# Altium PCB mp9943_evb.PcbDoc
Units mil, origin at the board's own origin, x right, y up, seen from the top; angles counter-clockwise.
Board outline 1968.5 x 1968.5 mil, 2 copper layers (Top Layer, Bottom Layer); 96 components, 36 nets, 227 pads, 338 vias.
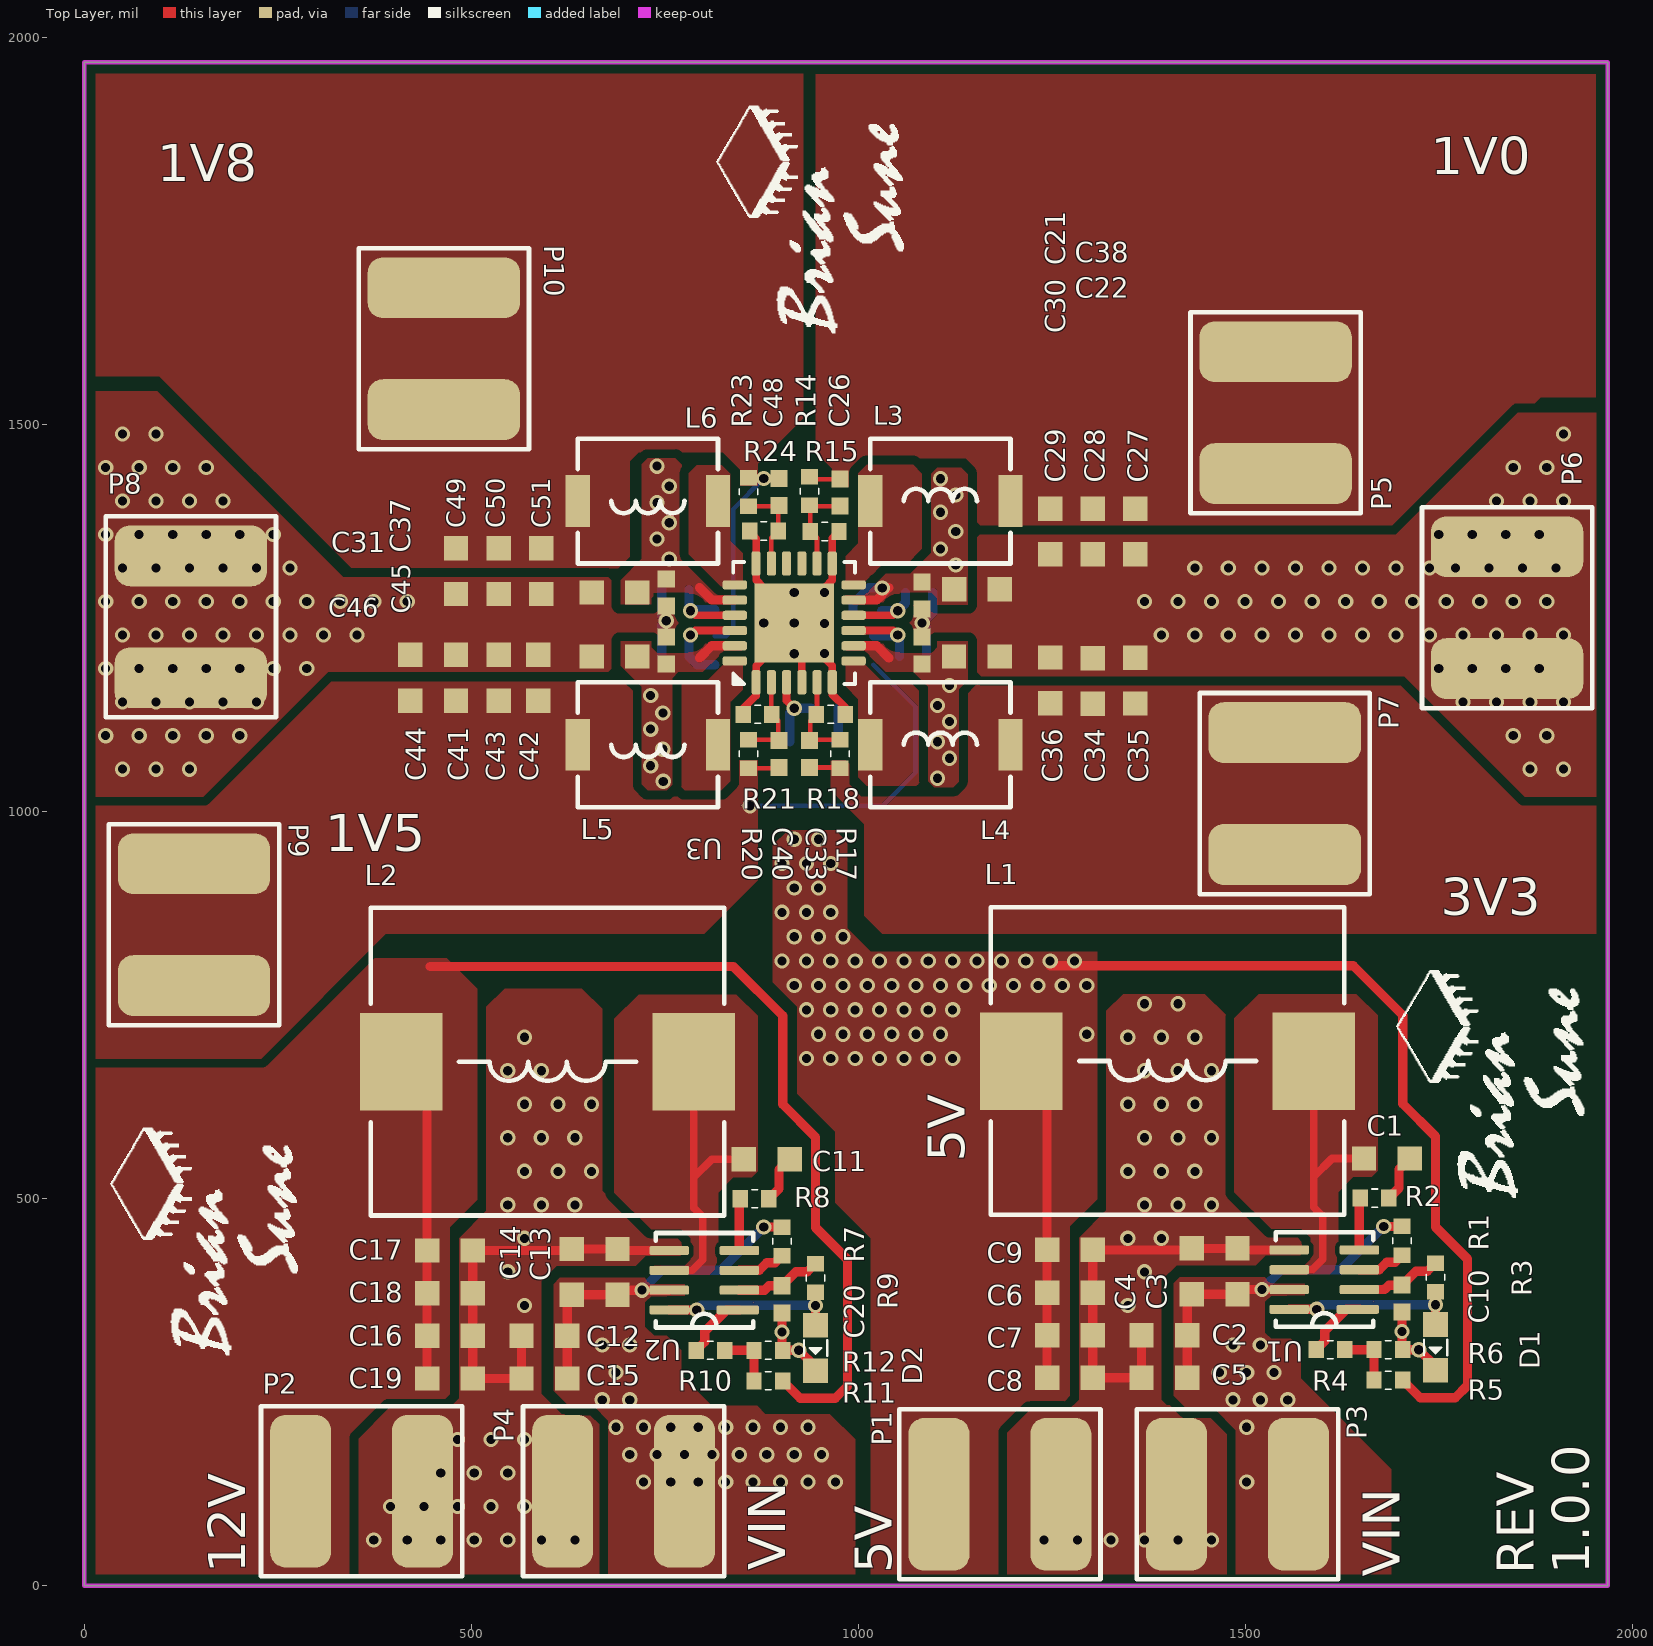
[diagram p0: Top Layer view]
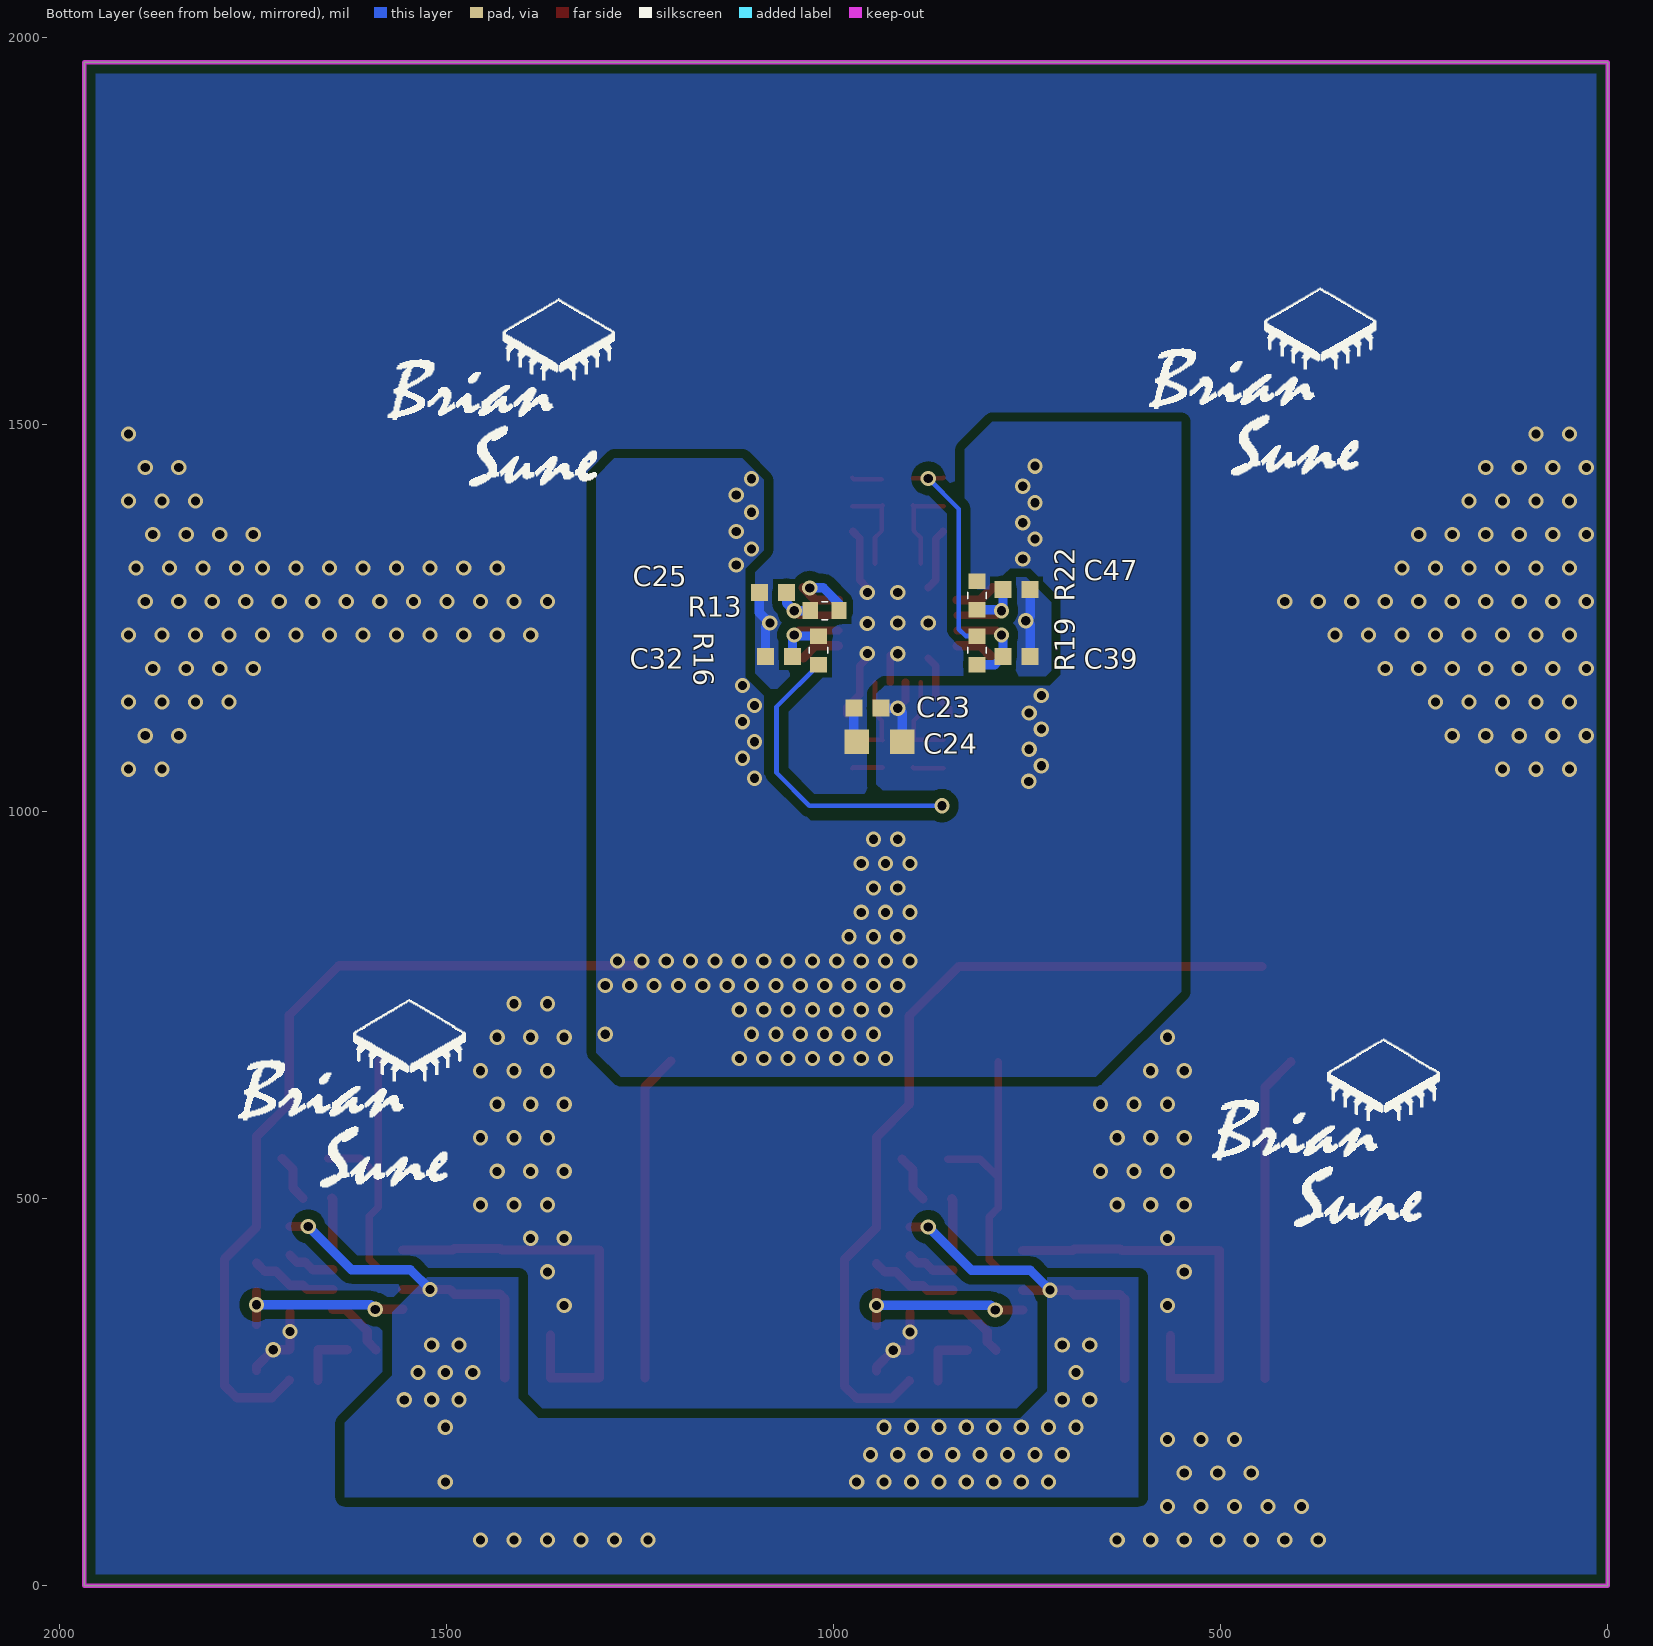
[diagram p1: Bottom Layer view, seen from below]
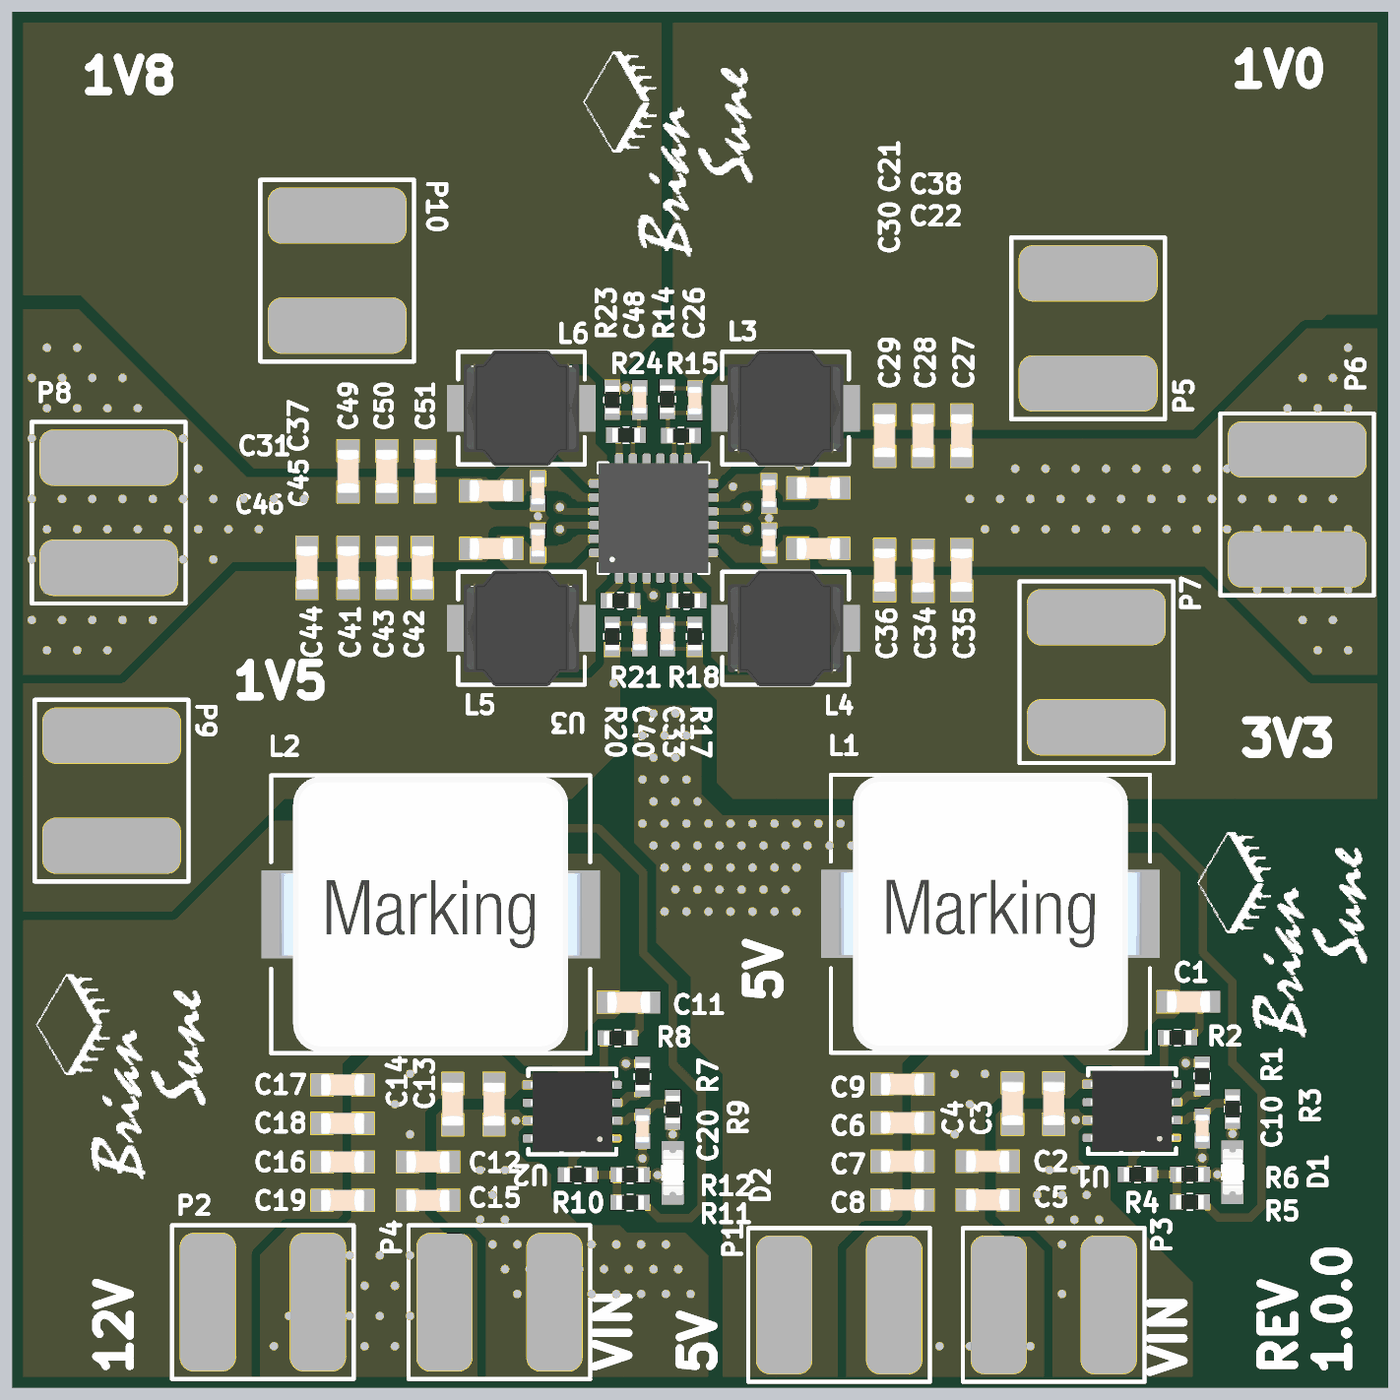
[diagram p2: 3D render of the assembled board from above, using the file's embedded part models]
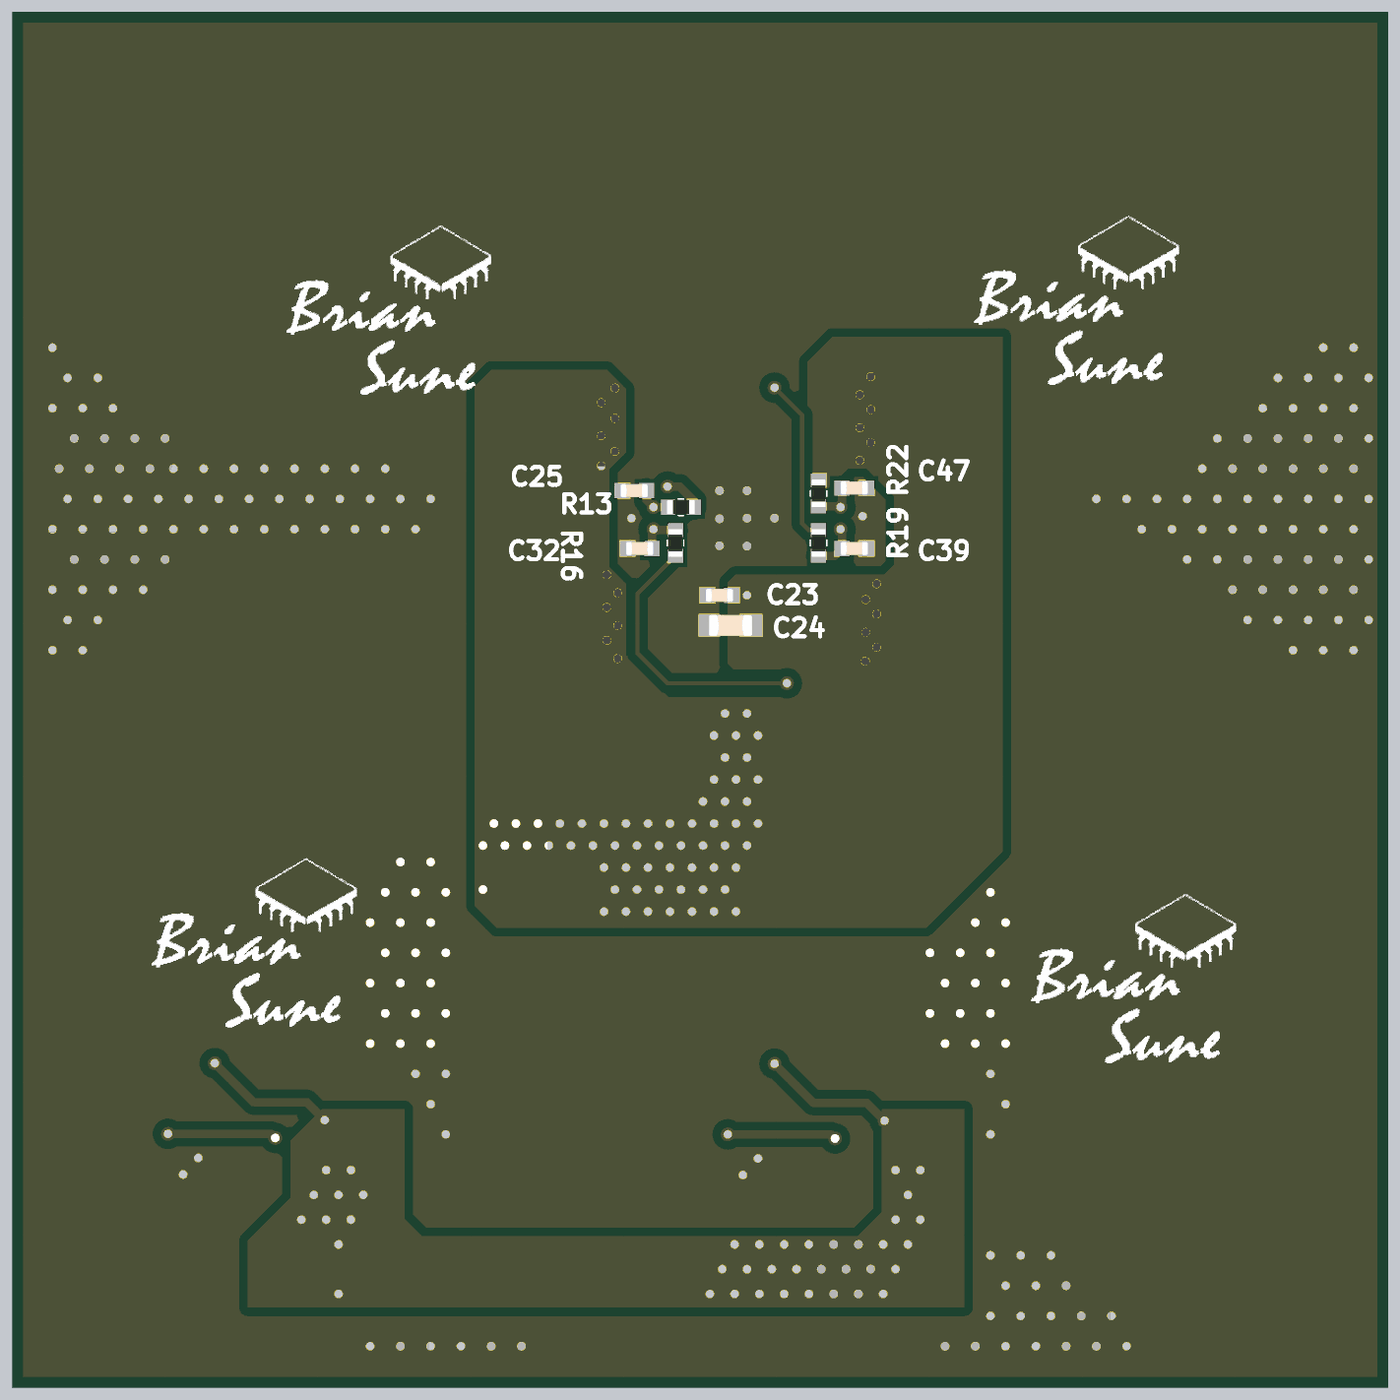
[diagram p3: 3D render of the assembled board from below, using the file's embedded part models]

## Layer stack, top to bottom
Top Solder: solder mask 0.4, Solder Resist, Dk 3.5
Top Layer: signal copper 1.4
Dielectric 1: dielectric 12.6, FR-4, Dk 4.8
Bottom Layer: signal copper 1.4
Bottom Solder: solder mask 0.4, Solder Resist, Dk 3.5

## Board outline
0,0 0,1968.5 1968.5,1968.5 1968.5,0

## Design rules (kind name [scope] priority, off if disabled: settings)
Clearance [All] p1: gap=6 ignorepadtopadclearanceinfootprint=FALSE except(0: Arc-Hole Track-Hole SMDPad-Hole THPad-Hole Via-Hole Fill-Hole Poly-Hole Region-Hole Text-Hole; 8: SMDPad-Region THPad-Region Poly-Region; 12: Arc-Poly Track-Poly THPad-Poly Via-Poly Fill-Poly Poly-Poly)
ComponentClearance [All] p1: gap=11.81 collisioncheckmode=3 verticalgap=11.81 showdistances=FALSE
DiffPairsRouting [All] p1: maxlimit=10 minlimit=6 mostfreqgap=8 toplayer_minwidth=6 toplayer_maxwidth=15 toplayer_prefwidth=8 bottomlayer_minwidth=6 bottomlayer_maxwidth=15 bottomlayer_prefwidth=8 maxuncoupledlength=500
Height [All] p1: minheight=0 maxheight=1574.8 prefheight=500
HoleSize [All] p1: absolutevalues=TRUE maxlimit=236.22 minlimit=1 maxpercent=80.000 minpercent=20.000
HoleToHoleClearance [All] p1: gap=3 allowstackedmicrovias=TRUE
MinimumSolderMaskSliver [All] p1: minsoldermaskwidth=1
PolygonConnect [All] p1: connectstyle=Direct reliefconductorwidth=12 reliefentries=4 polygonreliefangle="90 Angle" airgapwidth=12
RoutingVias [All] p1: holewidth=15.75 width=23.62 viastyle="Through Hole" minholewidth=11.81 minwidth=19.68 maxholewidth=110.24 maxwidth=118.11
SilkToSilkClearance [All] p1: silktosilkclearance=3
SilkToSolderMaskClearance [IsPad] p1: minsilkscreentomaskgap=1 clearancetoexposedcopper=TRUE
SolderMaskExpansion [All] p1: expansion=1
Width [All] p1: maxlimit=40 minlimit=6 preferedwidth=10
22 further rules are at their usual default settings.

## Classes and differential pairs
component class ZYNQ_PWR: C21 C22 C23 C24 C25 C26 C27 C28 C29 C30 C31 C32 C33 C34 C35 C36 C37 C38 C39 C40 C41 C42 C43 C44 C45 C46 C47 C48 C49 C50 C51 L3 L4 L5 L6 P5 P6 P7 P8 P9 P10 R13 R14 R15 R16 R17 R18 R19 R20 R21 R22 R23 R24 U3
component class mp9943_evb: C1 C2 C3 C4 C5 C6 C7 C8 C9 C10 C11 C12 C13 C14 C15 C16 C17 C18 C19 C20 D1 D2 L1 L2 P1 P2 P3 P4 R1 R2 R3 R4 R5 R6 R7 R8 R9 R10 R11 R12 U1 U2

## Components (designator, comment, footprint, x,y, rotation, side; value= is the part's Value field where it differs from the comment)
C1 "100nF" C0603 1683.07,551.96 r0 top
C2 "100nF" C0603 1395.67,323.62 r0 top
C3 "10uF" C0603 1490.16,406.3 r270 top
C4 "10uF" C0603 1431.1,406.3 r270 top
C5 "10uF" C0603 1395.67,268.5 r0 top
C6 "22uF" C0603 1273.62,378.74 r180 top
C7 "22uF" C0603 1273.62,323.62 r180 top
C8 "22uF" C0603 1273.62,268.5 r180 top
C9 "100nF" C0603 1273.62,433.85 r180 top
C10 "100nF" 0402#1 1702.76,370.86 r90 top
C11 "100nF" C0603 881.89,551.18 r0 top
C12 "100nF" C0603 594.49,322.83 r0 top
C13 "10uF" C0603 688.98,405.51 r270 top
C14 "10uF" C0603 629.92,405.51 r270 top
C15 "10uF" C0603 594.49,267.72 r0 top
C16 "22uF" C0603 472.44,322.83 r180 top
C17 "22uF" C0603 472.44,433.07 r180 top
C18 "22uF" C0603 472.44,377.95 r180 top
C19 "100nF" C0603 472.44,267.72 r180 top
C20 "100nF" 0402#1 901.57,370.08 r90 top
C21 "100nF" 0402#1 1082.68,1279.53 r270 top
C22 "10uF" C0603 1153.32,1200.72 r180 top
C23 "100nF" 0402#1 956.69,1133.86 r0 bottom
C24 "10uF" C0603 940.94,1090.55 r180 bottom
C25 "100nF" 0402#1 1078.74,1283.46 r0 bottom
C26 "180pF" 0402#1 976.38,1412.39 r270 top
C27 "22uF" C0603 1358.27,1362.2 r90 top
C28 "10uF" C0603 1303.15,1362.2 r90 top
C29 "10uF" C0603 1248.03,1362.2 r90 top
C30 "100nF" 0402#1 1082.68,1208.58 r90 top
C31 "10uF" C0603 685.04,1283.46 r0 top
C32 "100nF" 0402#1 1070.87,1200.79 r0 bottom
C33 "180pF" 0402#1 937.01,1074.8 r90 top
C34 "22uF" C0603 1303.15,1168.96 r270 top
C35 "10uF" C0603 1358.27,1169.55 r270 top
C36 "10uF" C0603 1248.03,1169.93 r270 top
C37 "100nF" 0402#1 751.97,1283.46 r270 top
C38 "10uF" C0603 1153.54,1287.4 r180 top
C39 "100nF" 0402#1 763.78,1200.79 r180 bottom
C40 "180pF" 0402#1 897.64,1074.8 r90 top
C41 "22uF" C0603 480.31,1173.23 r270 top
C42 "10uF" C0603 586.61,1173.23 r270 top
C43 "10uF" C0603 535.43,1173.23 r270 top
C44 "10uF" C0603 421.26,1173.23 r270 top
C45 "100nF" 0402#1 751.97,1208.66 r90 top
C46 "10uF" C0603 685.1,1200.72 r0 top
C47 "100nF" 0402#1 763.78,1287.4 r180 bottom
C48 "180pF" 0402#1 897.64,1413.39 r270 top
C49 "22uF" C0603 480.32,1311.02 r90 top
C50 "10uF" C0603 535.43,1311.02 r90 top
C51 "10uF" C0603 590.55,1311.02 r90 top
D1 "Green" LED_SML-LX0603GW-TR_LUM 1746.06,307.87 r90 top
D2 "Green" LED_SML-LX0603GW-TR_LUM 944.88,307.09 r90 top
L1 "2.2uH" IND_1040-WE-LHMI_WRE 1399.61,677.95 r0 top
L2 "2.2uH" IND_1040-WE-LHMI_WRE 598.43,677.17 r0 top
L3 "2.2uH" 04x0SMD 1106.3,1401.57 r180 top
L4 "2.2uH" 04x0SMD 1106.29,1086.61 r180 top
L5 "2.2uH" 04x0SMD 728.34,1086.61 r0 top
L6 "2.2uH" 04x0SMD 728.34,1401.57 r0 top
P1 "A11/6.3uH" 2x3mmPad 1183.07,118.11 r0 top
P2 "A11/6.3uH" 2x3mmPad 358.27,122.05 r0 top
P3 "A11/6.3uH" 2x3mmPad 1490.16,118.11 r180 top
P4 "A11/6.3uH" 2x3mmPad 696.85,122.05 r180 top
P5 "A11/6.3uH" 2x3mmPad 1539.37,1515.75 r90 top
P6 "A11/6.3uH" 2x3mmPad 1838.58,1263.78 r90 top
P7 "A11/6.3uH" 2x3mmPad 1551.18,1023.62 r90 top
P8 "A11/6.3uH" 2x3mmPad 137.66,1251.97 r90 top
P9 "A11/6.3uH" 2x3mmPad 141.73,854.11 r90 top
P10 "A11/6.3uH" 2x3mmPad 464.57,1598.43 r270 top
R1 "1M" 0402#2 1702.76,445.67 r90 top
R2 "22R" 0402#2 1667.32,500.78 r0 top
R3 "1M" 0402#2 1746.06,398.42 r270 top
R4 "51k" 0402#2 1610.24,304.92 r0 top
R5 "51k" 0402#2 1685.04,265.55 r0 top
R6 "51k" 0402#2 1685.04,304.92 r180 top
R7 "1M" 0402#2 901.57,444.88 r90 top
R8 "22R" 0402#2 866.14,500 r0 top
R9 "1M" 0402#2 944.88,397.64 r270 top
R10 "51k" 0402#2 809.06,304.13 r0 top
R11 "51k" 0402#2 883.86,264.76 r0 top
R12 "51k" 0402#2 883.86,304.13 r180 top
R13 "100k" 0402#2 1011.81,1259.84 r0 bottom
R14 "100k" 0402#2 937.01,1414.39 r90 top
R15 "150k" 0402#2 956.69,1362.2 r0 top
R16 "100k" 0402#2 1019.69,1208.66 r90 bottom
R17 "200k" 0402#2 976.38,1074.8 r270 top
R18 "44k2" 0402#2 964.57,1125.98 r180 top
R19 "100k" 0402#2 814.96,1208.66 r270 bottom
R20 "150k" 0402#2 858.27,1074.8 r270 top
R21 "100k" 0402#2 870.08,1125.98 r0 top
R22 "100k" 0402#2 814.96,1279.53 r270 bottom
R23 "200k" 0402#2 858.27,1413.39 r90 top
R24 "100k" 0402#2 878.14,1363.02 r180 top
U1 "MP9943GQ-Z" QFN8_3x3_NEP 1602.36,395.47 r180 top
U2 "MP9943GQ-Z" QFN8_3x3_NEP 801.18,394.69 r180 top
U3 "EA3059" QFN-24 917.32,1244.09 r90 top

## Footprints (in the part's own frame and the unit in brackets; to place one, negate y for a bottom-side part, rotate by r counter-clockwise, add the part's x,y. Pads: shape width x height; smd on the part's side, far side on the other; paste and mask are expansions set on the pad)
2x3mmPad [mm]
  rrect50% 2x5 smd: 1(-2,0) 2(2,0)
  silkscreen extent -3.3,-2.79 3.3,2.79
04x0SMD [mm]
  rect 0.8x1.7 smd paste+0 mask+0: 1(-2.3,0) 2(2.3,0)
  silkscreen extent -2.3,-2.05 2.3,2.05, body extent -2.1,-2.1 2.1,2.1, height 1.8
0402#1 [mil]
  rect 22x22 smd: 1(-17.5,0) 2(17.5,0)
  body extent -20,-10 20,10, height 20
0402#2 [mil]
  rect 20x22 smd: 1(-18.5,0) 2(18.5,0)
  silkscreen extent -4,-12 4,12, body extent -20,-10 20,10, height 14
C0603 [mm]
  rect 0.8x0.8 smd: 1(-0.75,0) 2(0.75,0)
  body extent -0.8,-0.4 0.8,0.4, height 0.81
IND_1040-WE-LHMI_WRE [mm]
  rect 2.7x3.2 smd paste+0 mask+0: 1(-4.8,0) 2(4.8,0)
  silkscreen extent -5.8,-5.05 5.8,5.05, body extent -5.5,-5 5.5,5, height 3.8
LED_SML-LX0603GW-TR_LUM [mil]
  rect 32x32 smd paste+0 mask+0: 1(-29.5,0) 2(29.5,0)
  silkscreen extent -10,-15 10,15, body extent -32,-14 33,14, height 27
QFN8_3x3_NEP [mm]
  rrect50% 1.4x0.3 smd paste-0.064: 1(-1.1,0.975)
  rrect40% 1.3x0.3 smd: 2(-1.15,0.325) 3(-1.15,-0.325) 4(-1.15,-0.975) 5(1.15,-0.975) 6(1.15,-0.325) 7(1.15,0.325) 8(1.15,0.975)
  silkscreen extent -1.6,-1.55 1.6,1.55, body extent -1.5,-1.45 1.5,1.45, height 0.6
QFN-24 [mm]
  rrect50% 0.8x0.3 smd: 1(-1.95,1.25) 2(-1.95,0.75) 3(-1.95,0.25) 4(-1.95,-0.25) 5(-1.95,-0.75) 6(-1.95,-1.25) 13(1.95,-1.25) 14(1.95,-0.75) 15(1.95,-0.25) 16(1.95,0.25) 17(1.95,0.75) 18(1.95,1.25)
  rrect50% 0.3x0.8 smd: 7(-1.25,-1.95) 8(-0.75,-1.95) 9(-0.25,-1.95) 10(0.25,-1.95) 11(0.75,-1.95) 12(1.25,-1.95) 19(1.25,1.95) 20(0.75,1.95) 21(0.25,1.95) 22(-0.25,1.95) 23(-0.75,1.95) 24(-1.25,1.95)
  rect 2.6x2.6 smd: 25(0,0)
  silkscreen extent -2,-2 2,2, body extent -2,-2 2,2, height 0.9

## Part data
C1 C2 C9 C11 C12 C19: library part taobao_100nF, "104P 50V 0.1UF 100NF", Mfr.="Your Cee", Mfr. No=104P, ComponentLink1Description=taobao, ComponentLink1URL=https://item.taobao.com/item.htm?spm=a1z09.2.0.0.37a92e8dhQcjld&id=522573286298&_u=k10quk0k8828, Price=0.01
C3 C4 C5 C13 C14 C15 C22 C24 C28 C29 C31 C35 C36 C38 C42 C43 C44 C46 C50 C51: library part taobao_10uF, "OUDEIBUN / 50V 10% 106K X5R", Mfr.=OUDEIBUN, Mfr. No=106, ComponentLink1Description=taobao, ComponentLink1URL=https://detail.tmall.com/item.htm?abbucket=11&id=610884231672&rn=bfecce7903ee26d41e055cbdf2d2e6eb&spm=a1z10.3-b.w4011-22147617817.28.ed547d1efUUngR&skuId=4463564134689, Price=0.2
C6 C7 C8 C16 C17 C18 C27 C34 C41 C49: library part taobao_22uF, "OUDEIBUN / 25V 10% 226K X5R", Mfr.=OUDEIBUN, Mfr. No=226, ComponentLink1Description=taobao, ComponentLink1URL=https://detail.tmall.com/item.htm?abbucket=11&id=610150156146&rn=59afea97bc42016507be0d5449395d39&spm=a1z10.3-b.w4011-22147617817.29.2b4e7d1e4hXUjj&skuId=4292454384286, Price=0.6
C10 C20: library part CC0402KRX7R9BB104, "100nF(104) +/-10% 50V X7R CC0402KRX7R9BB104", Mfr.=YAGEO, ComponentLink2Description=taobao, ComponentLink2URL=https://item.taobao.com/item.htm?spm=a1z09.2.0.0.6cd22e8dvd0KRh&id=635612378955&_u=j10quk0kc6c7, Mfr. No=CC0402KRX7R9BB104, Price=0.03
C21 C23 C25 C30 C32 C37 C39 C45 C47: library part GCM155R71H104ME02J, "GCM155R71H104ME02J / Multilayer Ceramic Capacitors MLCC - SMD/SMT", Mfr.="Murata Electronics", ComponentLink1Description=mouser, ComponentLink1URL=https://www.mouser.hk/ProductDetail/Murata-Electronics/GCM155R71H104ME02J?qs=QzBtWTOodeX25ZLBhHkqFQ%3D%3D, ComponentLink2Description=taobao, ComponentLink2URL=https://item.taobao.com/item.htm?spm=a1z10.3-c-s.w4002-24706531953.24.670d6a4bjaTv37&id=634658999620, Mfr. No=GCM155R71H104ME02J, Price=0.02
C26 C33 C40 C48: library part CL05C181JB5NNNC, "CL05C181JB5NNNC / 180pF(181) +/-5% 50V C0G", Mfr. No=Samsung, ComponentLink1Description=taobao, ComponentLink1URL=https://item.taobao.com/item.htm?spm=a1z10.3-c-s.w4002-24706531953.26.a6eb6a4bDB9NOZ&id=619556509633, Mfr.=CL05C181JB5NNNC, Price=0.03
D1 D2: library part 0603LED_GREEN, "Your Cee / (SMD) Green", Mfr.="Your Cee", Mfr. No="Green 2.9V", ComponentLink1Description=taobao, ComponentLink1URL=https://item.taobao.com/item.htm?spm=2013.1.0.0.379c29f8uyF9g1&id=522573309525, Price=0.04
L1 L2: library part L1040_222, "OUDEIBUN / 11.6x10.1mm SMD Power Inductor", Mfr.=OUDEIBUN, Mfr. No=1040, ComponentLink1Description=taobao, ComponentLink1URL=https://detail.tmall.com/item.htm?_u=o10quk0kcd81&id=610494207981&spm=a1z09.2.0.0.7bbe2e8deqhCM3, Price=0.6
L3 L4 L5 L6: library part L0420, "4.6mmx4.1mm (LxH) DCDC Inductor SMD", Mfr.="Your Cee", Mfr. No=0420_2R2, ComponentLink1Description=taobao, ComponentLink1URL=https://item.taobao.com/item.htm?spm=a1z10.5-c-s.w4002-24706531925.50.276641b1hW32l7&id=528437837997, Price=0.45
P1 P2 P3 P4 P5 P6 P7 P8 P9 P10: library part A11_QI_6u3H_DUAL, "A11_QI_6u3H_DUAL", Mfr.="Huihai Longteng", Mfr. No=A11, ComponentLink1Description=taobao, ComponentLink1URL=https://item.taobao.com/item.htm?spm=a1z09.2.0.0.f1702e8dvag9Bh&id=535912863390&_u=f10quk0kb827, Price=8.00
R1 R3 R7 R9: library part taobao_1Meg, "UNIOHM / 1M 1000K 1%", Mfr.=UNIOHM, Mfr. No=1MEG, ComponentLink1Description=taobao, ComponentLink1URL=https://item.taobao.com/item.htm?spm=a1z10.3-c-s.w4002-24706531953.48.69756a4bbhcoqL&id=525647000065, Price=0.012
R2 R8: library part taobao_22R, "UNIOHM / 22R 1% 1/16W", Mfr.=UNIOHM, ComponentLink1Description=taobao, ComponentLink1URL=https://item.taobao.com/item.htm?spm=a1z10.3-c-s.w4002-24706531953.22.fbb46a4bEDE57N&id=525596482937, Mfr. No=22R, Price=0.012
R4 R5 R6 R10 R11 R12: library part taobao_51k, "OUDEIBUN / 1% 51k", Mfr.=OUDEIBUN, ComponentLink1Description=taobao, ComponentLink1URL=https://detail.tmall.com/item.htm?abbucket=11&id=609307671775&rn=0149e1b5fdb20f46b57f4aa09e0d88dd&spm=a1z10.3-b.w4011-22147617817.31.43dc7d1emjXWoJ&skuId=4447096026291, Mfr. No=51k, Price=0.02
R13 R14 R16 R19 R21 R22 R24: library part taobao_100k, "OUDEIBUN / 1% 100k", Mfr.=UNIOHM, ComponentLink1Description=taobao, ComponentLink1URL=https://item.taobao.com/item.htm?spm=a1z09.2.0.0.44de2e8d3IDpt5&id=525633701805&_u=o10quk0k9fd0, Mfr. No=100k, Price=0.012
R15 R20: library part taobao_150k, "OUDEIBUN / 1% 150k", Mfr.=UNIOHM, ComponentLink1Description=taobao, ComponentLink1URL=https://detail.tmall.com/item.htm?abbucket=11&id=608928061564&rn=4c37b34fc9dccdc2648173b890fd7863&spm=a1z10.3-b.w4011-22147617817.39.76cf7d1eaF9LC8, Mfr. No=150k, Price=0.02
R17 R23: library part taobao_200k, "OUDEIBUN / 1% 200k", Mfr.=OUDEIBUN, ComponentLink1Description=taobao, ComponentLink1URL=https://detail.tmall.com/item.htm?abbucket=11&id=608928769417&rn=96a7feb5c32a75cc27cfeb620927404b&spm=a1z10.3-b.w4011-22147617817.31.51a57d1eaagcwg&skuId=4451366407389, Mfr. No=200k, Price=0.02
R18: library part taobao_44k2, "UNIOHM / 44k2 1% 1/16W", Mfr.=UNIOHM, ComponentLink1Description=taobao, ComponentLink1URL=https://item.taobao.com/item.htm?spm=a1z10.3-c-s.w4002-24706531953.9.63cb6a4b6BhLES&id=525646668658, Mfr. No=44k2, Price=0.012
U1 U2: "High Efficiency 3A Peak, 36V, Synchronous Step Down Converter with Power Good", Mfr.="Monolithic Power Systems (MPS)", ComponentLink1Description=taobao, ComponentLink1URL=https://item.taobao.com/item.htm?spm=a230r.1.14.1.1b772dc2TjPeUb&id=665665975436&ns=1&abbucket=5#detail, Mfr. No=MP9943GQ-Z, Price=1.89
U3: "The EA3059 is a 4-CH power management IC for applications powered by one Li-Ion battery or a DC 5V adapter.", Mfr.=EverAnalog, Mfr. No=EA3059QDR, ComponentLink1Description=taobao, ComponentLink1URL=https://item.taobao.com/item.htm?spm=a230r.1.14.22.493b4027s4M1UI&id=677106542609&ns=1&abbucket=5#detail, Price=1.0

## Via types
v1: diameter 19.68, hole 11.81, Top Layer to Bottom Layer, tented both sides, 338 vias

## Nets (pads, with @x,y where several pads share a name; then routed paths per layer and width w, separated by ;. In a path a pad name is that pad's centre, name@x,y a point inside that pad or via, vN(x,y) a via of type N, cw(c..) or ccw(c..) an arc to the next point about the centre after c; other vN are vias at no path point)
5V3A: C6.2 C7.2 C8.2 C9.2 C21.1 C22.2 C23.1 C24.2 C30.1 C31.2 C37.1 C38.2 C45.1 C46.2 L1.1 P1.1 R5.2 R13.1 R22.1 U3.3 U3.8 U3.11 U3.20 U3.23 | length 1886.9
  Top Layer w10: U3.3 907.48,1143.7 v1(917.32,1133.86)
  Top Layer w12: 795.05,1198.82 810.8,1214.57 U3.23 ; 795.05,1289.37 810.8,1273.62 U3.20 ; U3.8 1023.85,1214.57 1039.6,1198.82 ; U3.11 1023.85,1273.62 v1@1039.6,1289.37 ; L1.1 1244.09,644.48 C9.2 C6.2 C7.2 C8.2 ; v1@1248.03,800.98 1639.76,800.98 1703.54,737.2 1703.54,622.83 1746.06,580.31 1746.06,463.57 1787.4,422.23 1787.4,258.66 1771.65,242.91 1726.18,242.91 R5.2
  Bottom Layer w12: C24.2 911.42,1127.95 v1(917.32,1133.86) C23.1 ; R13.1 993.31,1268.9 1013.78,1289.37 v1(1031.15,1289.37)
  other v1: 933.08,681.11 964.57,681.11 996.07,681.11 1027.57,681.11 1059.06,681.11 1090.56,681.11 1122.05,681.11 948.83,712.6 980.32,712.6 1011.82,712.6 1043.31,712.6 1074.81,712.6 1106.31,712.6 1295.28,712.6 933.08,744.1 964.57,744.1 996.07,744.1 1027.57,744.1 1059.06,744.1 1090.56,744.1 1122.05,744.1 917.33,775.6 948.83,775.6 980.32,775.6 1011.82,775.6 1043.31,775.6 1074.81,775.6 1106.31,775.6 1137.8,775.6 1169.3,775.6 1200.79,775.6 1232.29,775.6 1263.79,775.6 1295.28,775.6 901.58,807.09 933.08,807.09 964.57,807.09 996.07,807.09 1027.57,807.09 1059.06,807.09 1090.56,807.09 1122.05,807.09 1153.55,807.09 1185.05,807.09 1216.54,807.09 1248.04,807.09 1279.53,807.09 917.33,838.59 948.83,838.59 980.32,838.59 901.58,870.08 933.08,870.08 964.57,870.08 917.33,901.58 948.83,901.58 901.58,933.08 933.08,933.08 964.57,933.08 917.33,964.57 948.83,964.57 748.03,1039.37 1102.36,1043.31 731.8,1059.57 1118.11,1069.24 747.54,1080.88 1102.36,1090.55 731.8,1106.81 1118.11,1116.48 747.54,1127.61 1102.36,1137.29 731.8,1150.26 1118.11,1163.21 1125.98,1318.9 755.91,1326.77 1106.3,1339.77 740.16,1352.7 1125.98,1362.2 755.91,1373.51 1106.3,1387.01 740.16,1399.43 1125.98,1409.45 755.91,1420.75 1106.3,1430.34 740.16,1446.68
12V3A: C16.2 C17.2 C18.2 C19.2 L2.1 P2.1 R11.2 | length 1518.3
  Top Layer w12: L2.1 442.91,643.7 C17.2 C18.2 C16.2 442.91,295.28 C19.2 ; 446.85,800.2 838.58,800.2 902.36,736.42 902.36,622.05 944.88,579.52 944.88,462.78 986.22,421.44 986.22,257.87 970.47,242.13 925,242.13 R11.2
+1V: C26.1 C27.2 C28.2 C29.2 L3.1 P5.1 P5.2 R14.2 | length 39.2
  Top Layer w6: R14.2@938.01,1429.89 974.38,1429.89 C26.1@976.38,1431.89
+1V5: C40.1 C41.2 C42.2 C43.2 C44.2 L5.1 P9.1 P9.2 R16.1 R20.2 | length 433.5
  Top Layer w6: R20.2 896.64,1056.3 C40.1
  Bottom Layer w6: v1(860.23,1007.87) 1031.5,1007.87 1074.03,1050.41 1074.03,1135.82 R16.1
+1V8: C48.1 C49.2 C50.2 C51.2 L6.1 P10.1 P10.2 R19.1 R23.2 | length 278.1
  Top Layer w6: R23.2 859.27,1430.89 v1(877.95,1430.89) C48.1
  Bottom Layer w6: R19.1 829.52,1227.16 838.39,1236.03 838.39,1391.33 v1(877.95,1430.89)
+3V3: C33.1 C34.2 C35.2 C36.2 L4.1 P7.1 P7.2 R17.2 | length 39.8
  Top Layer w6: C33.1 975.38,1057.3 R17.2
GND: C2.1 C3.1 C4.1 C5.1 C6.1 C7.1 C8.1 C9.1 C10.1 C12.1 C13.1 C14.1 C15.1 C16.1 C17.1 C18.1 C19.1 C20.1 C21.2 C22.1 C23.2 C24.1 C25.2 C27.1 C28.1 C29.1 C30.2 C31.1 C32.2 C34.1 C35.1 C36.1 C37.2 C38.1 C39.2 C41.1 C42.1 C43.1 C44.1 C45.2 C46.1 C47.2 C49.1 C50.1 C51.1 D1.1 D2.1 P1.2 P2.2 P3.2 P4.2 P6.1 P6.2 P8.1 P8.2 R6.1 R12.1 R15.2 R18.1 R21.1 R24.2 U1.5 U2.5 U3.1 U3.4 U3.6 U3.13 U3.18 U3.25 | length 1877
  Top Layer w10: R21.1 851.58,1133.86 868.11,1150.39 U3.1 868.11,1188.61 U3.25@877.95,1198.45 ; R24.2@858.82,1362.2 868.11,1352.92 U3.18 868.11,1299.58 U3.25@877.95,1289.74 ; U3.4 U3.25@927.17,1201.85 ; U3.25@956.69,1198.45 966.54,1188.61 U3.6 966.54,1151.57 983.07,1135.04 R18.1 ; U3.25@956.69,1289.74 966.54,1299.58 U3.13 966.54,1353.55 R15.2
  Top Layer w12: C12.1 C15.1 C19.1 C16.1 C18.1 C17.1 627.95,433.07 C14.1 C13.1 690.95,433.07 U2.5 ; C20.1 v1(901.57,327.76) 901.57,304.92 R12.1 v1(923.23,304.13) 944.88,282.48 D2.1 ; C2.1 C5.1 C8.1 C7.1 C6.1 C9.1 1429.13,433.85 C4.1 C3.1 1492.13,433.85 U1.5 ; C10.1 v1(1702.76,328.54) 1702.76,305.7 R6.1 v1(1724.41,304.92) 1746.06,283.26 D1.1
  Bottom Layer w12: C39.2 746.28,1241.28 v1(751.97,1246.97) 746.28,1252.66 C47.2 ; C24.1 974.19,1094.27 C23.2 ; C32.2 1088.37,1238.41 v1(1082.68,1244.09) 1096.24,1257.66 C25.2
  other v1: 374.02,59.06 417.32,59.06 460.63,59.06 503.94,59.06 547.25,59.06 590.55,59.06 633.86,59.06 1240.16,59.06 1283.47,59.06 1326.77,59.06 1370.08,59.06 1413.39,59.06 1456.69,59.06 395.67,102.36 438.98,102.36 482.28,102.36 525.59,102.36 568.9,102.36 460.63,145.67 503.94,145.67 547.25,145.67 482.28,188.98 525.59,188.98 568.9,188.98 568.9,362.21 1348.43,362.21 547.25,405.51 1370.08,405.51 568.9,448.82 1348.43,448.82 1391.73,448.82 547.25,492.13 590.55,492.13 633.86,492.13 1370.08,492.13 1413.39,492.13 1456.69,492.13 568.9,535.43 612.21,535.43 655.51,535.43 1348.43,535.43 1391.73,535.43 1435.04,535.43 547.25,578.74 590.55,578.74 633.86,578.74 1370.08,578.74 1413.39,578.74 1456.69,578.74 568.9,622.05 612.21,622.05 655.51,622.05 1348.43,622.05 1391.73,622.05 1435.04,622.05 547.25,665.36 590.55,665.36 1370.08,665.36 1413.39,665.36 1456.69,665.36 568.9,708.66 1348.43,708.66 1391.73,708.66 1435.04,708.66 1370.08,751.97 1413.39,751.97 49.21,1055.12 92.52,1055.12 135.83,1055.12 1868.11,1055.12 1911.42,1055.12 27.56,1098.43 70.87,1098.43 114.17,1098.43 157.48,1098.43 200.79,1098.43 1846.46,1098.43 1889.77,1098.43 49.21,1141.73 92.52,1141.73 135.83,1141.73 179.14,1141.73 222.44,1141.73 1781.5,1141.73 1824.81,1141.73 1868.11,1141.73 1911.42,1141.73 27.56,1185.04 70.87,1185.04 114.17,1185.04 157.48,1185.04 200.79,1185.04 244.1,1185.04 287.4,1185.04 1750.24,1185.04 1793.55,1185.04 1836.85,1185.04 1880.16,1185.04 917.32,1204.22 956.69,1204.72 49.21,1228.35 92.52,1228.35 135.83,1228.35 179.14,1228.35 222.44,1228.35 265.75,1228.35 309.06,1228.35 352.36,1228.35 1391.73,1228.35 1435.04,1228.35 1478.35,1228.35 1521.66,1228.35 1564.96,1228.35 1608.27,1228.35 1651.58,1228.35 1694.88,1228.35 1738.19,1228.35 1781.5,1228.35 1824.81,1228.35 1868.11,1228.35 1911.42,1228.35 956.69,1243.27 877.95,1244.09 917.32,1244.09 27.56,1271.66 70.87,1271.66 114.17,1271.66 157.48,1271.66 200.79,1271.66 244.1,1271.66 287.4,1271.66 330.71,1271.66 374.02,1271.66 417.32,1271.66 1370.08,1271.66 1413.39,1271.66 1456.69,1271.66 1500,1271.66 1543.31,1271.66 1586.62,1271.66 1629.92,1271.66 1673.23,1271.66 1716.54,1271.66 1759.84,1271.66 1803.15,1271.66 1846.46,1271.66 1889.77,1271.66 917.32,1283.46 956.69,1283.46 49.21,1314.96 92.52,1314.96 135.83,1314.96 179.14,1314.96 222.44,1314.96 265.75,1314.96 1435.04,1314.96 1478.35,1314.96 1521.66,1314.96 1564.96,1314.96 1608.27,1314.96 1651.58,1314.96 1694.88,1314.96 1738.19,1314.96 1771.89,1314.96 1815.2,1314.96 1858.51,1314.96 1901.81,1314.96 27.56,1358.27 70.87,1358.27 114.17,1358.27 157.48,1358.27 200.79,1358.27 244.1,1358.27 1750.24,1358.27 1793.55,1358.27 1836.85,1358.27 1880.16,1358.27 49.21,1401.58 92.52,1401.58 135.83,1401.58 179.14,1401.58 1824.81,1401.58 1868.11,1401.58 1911.42,1401.58 27.56,1444.88 70.87,1444.88 114.17,1444.88 157.48,1444.88 1846.46,1444.88 1889.77,1444.88 49.21,1488.19 92.52,1488.19 1911.42,1488.19
NetC1_1: C1.1 L1.2 U1.6 | length 384.6
  Top Layer w10: U1.6 1586.61,408.26 1600.39,422.04 1600.39,477.16 1588.58,488.97 1588.58,528.34 ; L1.2 1588.58,528.34 ; C1.1 1612.2,551.96 1588.58,528.34
NetC1_2: C1.2 R2.2 | length 62.3
  Top Layer w12: R2.2 1698.82,513.78 1698.82,538.19 C1.2
NetC10_2: C10.2 R3.1 U1.2 | length 112.6
  Top Layer w12: U1.2 1680.13,382.67 1685.82,388.36 C10.2 1720.69,406.3 1735.44,406.3 R3.1
NetC11_1: C11.1 L2.2 U2.6 | length 384.6
  Top Layer w10: U2.6 785.43,407.48 799.21,421.26 799.21,476.38 787.4,488.19 787.4,527.56 ; L2.2 787.4,527.56 ; C11.1 811.02,551.18 787.4,527.56
NetC11_2: C11.2 R8.2 | length 62.3
  Top Layer w12: R8.2 897.64,513 897.64,537.4 C11.2
NetC20_2: C20.2 R9.1 U2.2 | length 112.6
  Top Layer w12: U2.2 878.95,381.89 884.64,387.58 C20.2 919.51,405.51 934.26,405.51 R9.1
NetC25_1: C25.1 R13.2 U3.10 | length 108.2
  Top Layer w10: U3.10 1045.27,1253.94 v1(1051.18,1259.85)
  Bottom Layer w12: R13.2 v1(1051.18,1259.85) 1061.24,1269.91 C25.1
NetC26_2: C26.2 R14.1 R15.1 U3.14 | length 117.5
  Top Layer w6: R14.1 R14.1@938.01,1394.89 ; U3.14 946.85,1354.18 938.82,1362.2 938.01,1363.02 R14.1@938.01,1394.89 ; C26.2 R14.1@938.01,1394.89
NetC32_1: C32.1 R16.2 U3.9 | length 120
  Top Layer w10: U3.9 1045.28,1234.25 v1(1051.18,1228.35)
  Bottom Layer w12: R16.2 1049.99,1227.16 v1(1051.18,1228.35) 1053.37,1226.16 C32.1
NetC33_2: C33.2 R17.1 R18.2 U3.5 | length 117.5
  Top Layer w6: C33.2 C33.2@938.01,1093.3 ; U3.5 946.85,1126.77 R18.2 938.01,1117.93 C33.2@938.01,1093.3 ; R17.1 C33.2@938.01,1093.3
NetC39_1: C39.1 R19.2 U3.22 | length 126.1
  Top Layer w10: v1(783.47,1228.34) 789.38,1234.25 U3.22
  Bottom Layer w12: v1(783.47,1228.34) 781.28,1226.15 C39.1 791.91,1190.16 R19.2
NetC40_2: C40.2 R20.1 R21.2 U3.2 | length 117.5
  Top Layer w6: R20.1 C40.2@896.64,1093.3 ; U3.2 887.8,1126.77 R21.2 896.64,1117.93 C40.2@896.64,1093.3 ; C40.2 C40.2@896.64,1093.3
NetC47_1: C47.1 R22.2 U3.21 | length 120
  Top Layer w10: v1(783.47,1259.85) 789.38,1253.94 U3.21
  Bottom Layer w12: C47.1 781.28,1262.04 v1(783.47,1259.85) 784.65,1261.03 R22.2
NetC48_2: C48.2 R23.1 R24.1 U3.17 | length 117.5
  Top Layer w6: R23.1 C48.2@896.64,1394.89 ; U3.17 887.8,1354.18 895.82,1362.2 R24.1 C48.2@896.64,1394.89 ; C48.2 C48.2@896.64,1394.89
NetD1_2: D1.2 R3.2 U1.8 | length 234
  Top Layer w12: U1.8 v1(1592.52,357.08) ; D1.2 R3.2
  Bottom Layer w12: v1(1592.52,357.08) 1598.43,362.99 v1(1746.06,362.99)
NetD2_2: D2.2 R9.2 U2.8 | length 234
  Top Layer w12: U2.8 v1(791.34,356.3) ; D2.2 R9.2
  Bottom Layer w12: v1(791.34,356.3) 797.24,362.2 v1(944.88,362.2)
NetL3_2: L3.2 U3.12
NetL4_2: L4.2 U3.7
NetL5_2: L5.2 U3.24
NetL6_2: L6.2 U3.19
NetR1_1: R1.1 U1.3 | length 62.9
  Top Layer w12: U1.3 1673.23,408.26 1683.07,418.11 1693.7,418.11 R1.1
NetR2_1: R2.1 U1.4 | length 67.4
  Top Layer w12: U1.4 1647.64,499.6 R2.1
NetR4_1: R4.1 U1.1 | length 85.1
  Top Layer w12: R4.1 1602.95,316.14 1602.95,329.13 1630.91,357.08 U1.1@1647.64,357.08
NetR4_2: R4.2 R5.1 R6.2 | length 77.2
  Top Layer w12: R4.2 R6.2 R5.1
NetR7_1: R7.1 U2.3 | length 62.9
  Top Layer w12: U2.3 872.05,407.48 881.89,417.32 892.52,417.32 R7.1
NetR8_1: R8.1 U2.4 | length 67.4
  Top Layer w12: U2.4 846.46,498.82 R8.1
NetR10_1: R10.1 U2.1 | length 85.1
  Top Layer w12: R10.1 801.77,315.35 801.77,328.35 829.72,356.3 U2.1@846.46,356.3
NetR10_2: R10.2 R11.1 R12.2 | length 77.2
  Top Layer w12: R10.2 R12.2 R11.1
VIN: C2.2 C3.2 C4.2 C5.2 C12.2 C13.2 C14.2 C15.2 P3.1 P4.1 R1.2 R7.2 U1.7 U2.7 | length 908
  Top Layer w12: C15.2 C12.2 624.02,370.08 C14.2 C13.2 694.88,381.89 v1(720.47,381.89) U2.7 ; v1(877.95,463.38) R7.2 ; C5.2 C2.2 1425.2,370.86 C4.2 C3.2 1496.06,382.67 v1(1521.65,382.67) U1.7 ; v1(1679.13,464.17) R1.2
  Bottom Layer w12: v1(720.47,381.89) 746.06,407.48 822.05,407.48 v1(877.95,463.38) ; v1(1521.65,382.67) 1547.24,408.26 1623.23,408.26 v1(1679.13,464.17)
  other v1: 722.44,133.86 757.87,133.86 793.31,133.86 828.74,133.86 864.17,133.86 899.61,133.86 935.04,133.86 970.47,133.86 1501.97,133.86 704.72,169.29 740.16,169.29 775.59,169.29 811.02,169.29 846.46,169.29 881.89,169.29 917.32,169.29 952.76,169.29 687.01,204.72 722.44,204.72 757.87,204.72 793.31,204.72 828.74,204.72 864.17,204.72 899.61,204.72 935.04,204.72 1501.97,204.72 669.29,240.16 704.72,240.16 1484.25,240.16 1519.68,240.16 1555.12,240.16 687.01,275.59 1466.54,275.59 1501.97,275.59 1537.4,275.59 669.29,311.02 704.72,311.02 1484.25,311.02 1519.68,311.02
pads on no net: U3.15 U3.16

## Polygon pours and split planes (outlines as drawn)
5V3A on Top Layer "5V3A_L01_P114" (solid, remove dead copper, pour order 114): 720.47,1448.82 728.35,1456.69 763.46,1456.69 771.85,1448.31 771.69,1448.15 771.69,1433.27 771.69,1326.82 818.9,1279.61 850.39,1279.61 850.39,1267.94 795.27,1267.94 779.66,1283.55 740.15,1283.55 732.28,1275.68 732.28,1267.94 692.91,1267.94 692.91,1299.3 720.47,1326.85
GND on Top Layer "GND_L01_P123" (solid, remove dead copper, pour order 123): 590.55,248.03 616.94,221.64 653.54,221.64 669.29,205.89 669.29,0 354.33,0 354.33,190.03 393.7,229.4 471.53,229.4 484.25,242.12 484.25,448.82 519.69,484.25 519.69,748.03 543.31,771.65 642.9,771.65 669.29,745.26 669.29,510.23 726.77,452.76 763.78,452.76 775.59,440.94 775.59,426.38 725.59,426.38 712.6,413.39 610.24,413.39 590.55,393.7
GND on Top Layer "GND_L01_P122" (solid, remove dead copper, pour order 122): 1391.73,240.49 1398.95,233.27 1452.41,233.27 1476.38,209.3 1476.38,0 1192.91,0 1192.91,197.35 1221.94,226.38 1271.65,226.38 1285.43,240.16 1285.43,449.6 1320.87,485.04 1320.87,742.91 1342.52,764.56 1448.04,764.56 1476.38,736.22 1476.38,503.94 1526.78,453.54 1564.96,453.54 1576.77,441.73 1576.77,427.17 1526.78,427.17 1513.78,414.17 1411.42,414.17 1391.73,394.48
12V3A on Top Layer "12V3A_L01_P129" (solid, remove dead copper, pour order 129): 0,811.02 468.5,811.02 507.87,771.65 507.87,498.82 472.44,463.38 472.44,0 0,0
+1V5 on Top Layer "+1V5_L01_P127" (solid, remove dead copper, pour order 127): 477.89,842.52 389.76,842.52 228.35,681.1 0,681.1 0,1168.31 700.58,1168.31 712.6,1156.3 712.6,1057.15 712.6,1031.5 724.41,1019.69 830.71,1019.69 846.46,1035.43 846.46,1066.93 870.08,1066.93 870.08,911.42 801.18,842.52
NetL3_2 on Top Layer "NETL3_2_L01_P115" (solid, remove dead copper, pour order 115): 1039.37,1319.34 1066.93,1319.34 1082.68,1335.09 1082.68,1436.5 1070.87,1448.31 1010.86,1448.31 1000,1437.45 1000,1346.9 980.31,1327.21 980.31,1287.6 1007.64,1287.6
NetL5_2 on Top Layer "NETL5_2_L01_P117" (solid, remove dead copper, pour order 117): 795.05,1168.96 767.49,1168.96 751.75,1153.21 751.74,1051.8 775.99,1027.56 822.79,1027.56 834.42,1039.19 834.42,1141.4 854.11,1161.08 854.11,1200.69 826.79,1200.69
NetL4_2 on Top Layer "NETL4_2_L01_P116" (solid, remove dead copper, pour order 116): 1011.32,1033.38 1076.37,1033.38 1082.9,1039.9 1082.9,1153.31 1067.15,1169.06 1039.6,1169.06 1007.86,1200.79 980.54,1200.79 980.54,1165.13 1000.22,1145.45 1000.22,1044.47
+3V3 on Top Layer "+3V3_L01_P128" (solid, remove dead copper, pour order 128): 1008,984.13 1008,865.7 1031.17,842.52 1968.51,842.52 1968.51,1165.36 1149.6,1165.36 1135.88,1151.64 1135.88,1033.52 1122.05,1019.68 1003.94,1019.69 988.19,1035.43 988.19,1065.78 964.57,1065.78 964.57,1027.56
NetL6_2 on Top Layer "NETL6_2_L01_P110" (solid, remove dead copper, pour order 110): 781.06,1437.59 791.34,1447.87 823.78,1447.87 834.65,1437.01 834.65,1350.48 854.33,1330.8 854.33,1287.17 827.01,1287.17 781.06,1333.11
5V3A on Top Layer "5V3A_L01_P113" (solid, remove dead copper, pour order 113): 1094.49,1437.01 1102.36,1444.88 1133.34,1444.88 1141.73,1436.49 1141.73,1267.86 1102.36,1267.86 1102.36,1275.6 1094.49,1283.46 1055.11,1283.46 1039.5,1267.86 984.25,1267.86 984.25,1279.53 1007.87,1279.53 1035.76,1307.42 1067.25,1307.42 1086.78,1326.94 1094.49,1334.65
5V3A on Top Layer "5V3A_L01_P112" (solid, remove dead copper, pour order 112): 1129.92,1039.01 1122.65,1031.74 1098.26,1031.74 1090.55,1039.45 1090.55,1161.33 1071.19,1180.69 1035.76,1180.69 1007.87,1208.58 984.25,1208.58 984.25,1220.25 1039.37,1220.25 1054.98,1204.64 1094.49,1204.64 1102.36,1212.51 1102.36,1220.25 1141.73,1220.25 1141.73,1169.93 1129.92,1158.12
5V3A on Top Layer "5V3A_L01_P111" (solid, remove dead copper, pour order 111): 720.47,1114.18 720.47,1035.44 728.35,1027.56 752.36,1027.56 759.79,1034.99 759.62,1172.6 767.71,1180.69 798.88,1180.69 826.77,1208.58 850.39,1208.58 850.39,1220.25 795.27,1220.25 779.66,1204.64 740.15,1204.64 732.28,1212.51 732.28,1220.25 692.91,1220.25 692.91,1188.89 720.47,1161.33
+1V8 on Top Layer "+1V8_L01_P130" (solid, remove dead copper, pour order 130): 704.72,1409.45 704.72,1452.76 716.54,1464.57 825.18,1464.57 848.3,1441.45 848.3,1421.26 870.08,1421.26 870.08,1449.82 929.13,1508.87 929.13,1968.51 0,1968.51 0,1562.99 96.95,1562.99 345.12,1314.82 690.25,1314.82 704.72,1329.3
+1V on Top Layer "+1V_L01_P131" (solid, remove dead copper, pour order 131): 1149.6,1445.93 1138.84,1456.69 1006.61,1456.69 988.16,1438.24 988.16,1420.75 966.54,1420.75 966.54,1443.16 944.88,1464.82 944.88,1968.5 1968.51,1968.5 1968.51,1535.43 1881.89,1535.43 1712.6,1366.15 1161.44,1366.15 1149.6,1377.98
GND on Top Layer "GND_L01_P124" (solid, remove dead copper, pour order 124): 314.96,1181.11 153.54,1019.69 -0.01,1019.68 0,1543.31 94.49,1543.31 334.65,1303.15 681.1,1303.15 681.1,1267.86 689.11,1259.85 728.34,1259.85 744.09,1275.59 767.49,1275.6 767.49,1212.45 744.25,1212.45 728.34,1228.35 688.97,1228.35 681.1,1220.48 681.1,1184.92 677.28,1181.11
GND on Top Layer "GND_L01_P125" (solid, remove dead copper, pour order 125): 1705.86,1175.11 1861.29,1019.68 1968.5,1019.69 1968.5,1175.11 1968.5,1515.75 1852.36,1515.75 1694.89,1358.27 1157.14,1358.27 1153.32,1354.45 1153.32,1303.27 1153.32,1267.72 1145.45,1259.85 1106.08,1259.85 1090.18,1275.75 1066.93,1275.75 1066.93,1212.6 1090.33,1212.6 1106.08,1228.35 1145.31,1228.35 1153.32,1220.34 1153.32,1181.11 1159.32,1175.11
NetC1_1 on Top Layer "NETC1_1_L01_P119" (solid, remove dead copper, pour order 119): 1584.65,449.6 1572.83,461.41 1533.46,461.41 1486.22,508.66 1486.22,733.07 1517.72,764.56 1643.7,764.56 1671.26,737 1671.26,536.22 1663.39,528.34 1639.76,528.34 1620.08,508.66 1620.08,410.23 1612.2,402.36 1537.4,402.36 1537.4,414.17 1576.77,414.17 1584.65,422.04
VIN on Top Layer "VIN_L01_P120" (solid, remove dead copper, pour order 120): 1407.48,245.15 1424.29,228.35 1460.63,228.35 1488.19,200.79 1488.19,0 1688.98,0 1688.98,150.4 1571.66,267.72 1571.66,306.29 1559.06,318.9 1533.46,318.9 1525.59,326.77 1525.59,366.93 1533.46,374.8 1576.77,374.8 1576.77,390.55 1533.46,390.55 1525.59,398.42 1415.35,398.42 1407.48,390.55
5V3A on Top Layer "5V3A_L01_P126" (solid, remove dead copper, pour order 126): 1273.62,232.08 1181.1,139.56 1181.1,0 1016.36,0 1016.36,448.82 970.47,494.7 970.47,586.61 921.26,635.83 921.26,748.03 889.76,779.53 889.76,956.69 909.45,976.38 970.24,976.38 985.98,960.63 985.98,849.27 1016.36,818.9 1309.06,818.9 1309.06,499.6 1273.62,464.17
VIN on Top Layer "VIN_L01_P121" (solid, remove dead copper, pour order 121): 606.3,251.97 626.66,231.61 658.97,231.61 677.17,213.41 677.17,0 996.06,0 996.06,188.98 963.4,221.64 880.12,221.64 869.48,232.28 810.49,232.28 771.12,271.65 771.12,304.09 752.38,322.83 736.22,322.83 724.41,334.65 724.41,366.14 732.28,374.02 775.59,374.02 775.59,389.76 732.28,389.76 724.41,397.64 614.17,397.64 606.3,389.76
NetC11_1 on Top Layer "NETC11_1_L01_P118" (solid, remove dead copper, pour order 118): 783.46,448.82 771.65,460.63 732.28,460.63 685.04,507.87 685.04,732.28 716.54,763.78 842.52,763.78 870.08,736.22 870.08,535.43 862.2,527.56 838.58,527.56 818.9,507.87 818.9,409.45 811.02,401.57 736.22,401.57 736.22,413.39 775.59,413.39 783.46,421.26
GND on Bottom Layer "GND_L02_P134" (solid, remove dead copper, pour order 134): 0,1968.5 0,0 1968.5,0 1968.51,1968.5
5V3A on Bottom Layer "Bottom Layer-5V3A" (solid, remove dead copper, pour order 133): 944.88,1035.43 937.01,1027.56 849.31,1027.56 842.5,1020.75 842.5,996.36 850.67,988.19 1030.05,988.19 1090.55,1048.69 1090.55,1150.26 1114.17,1173.88 1114.17,1314.31 1090.55,1337.93 1090.55,1429.13 1118.11,1456.69 1283.46,1456.69 1307.09,1433.07 1307.09,688.98 1275.59,657.48 661.42,657.48 551.18,767.72 551.18,1503.94 795.28,1503.94 830.71,1468.5 830.71,1303.15 814.96,1287.4 799.63,1287.4 772.07,1314.96 746.28,1314.96 706.88,1275.56 706.88,1177.17 720.83,1163.21 934.11,1163.21 944.88,1152.44
VIN on Bottom Layer "VIN_L02_P132" (solid, remove dead copper, pour order 132): 1525.59,398.42 1570.61,353.4 1570.61,271.66 1631.89,210.38 1631.89,114.17 606.3,114.17 606.3,398.42 724.41,398.42 724.41,251.02 758.89,216.54 1381.89,216.54 1407.48,242.13 1407.48,398.42

## Keep-outs
Keep-Out Layer:
  the board outline again, w6

## Silkscreen, mask and mechanical layers (free items; w line width, h text height)
Top Overlay:
  drawing of 33 lines, arcs and shapes, not listed
  text "1V0" at 1740.16,1824.18 h48
  text "1V8" at 94.49,1814.96 h48
  text "1V5" at 311.02,948.82 h48
  text "3V3" at 1752.94,866.14 h48
  text "5V" at 1137.79,547.94 h48 r90
  text "VIN" at 905.51,19.68 h48 r90
  text "12V" at 208.12,15.75 h48 r90
  text "5V" at 1043.31,15.75 h48 r90
  text "REV / 1.0.0" at 1944.88,15.07 h48 r90
  text "VIN" at 1700.09,11.81 h48 r90
Bottom Overlay:
  drawing of 44 lines, arcs and shapes, not listed